# Altium PCB 2LayerPCBTemplateWWU.PcbDoc
Units mm, origin at the board's own origin, x right, y up, seen from the top; angles counter-clockwise.
Board outline 88.65 x 48.26 mm, 2 copper layers (Top Layer, Bottom Layer); 71 components, 68 nets, 259 pads, 33 vias.
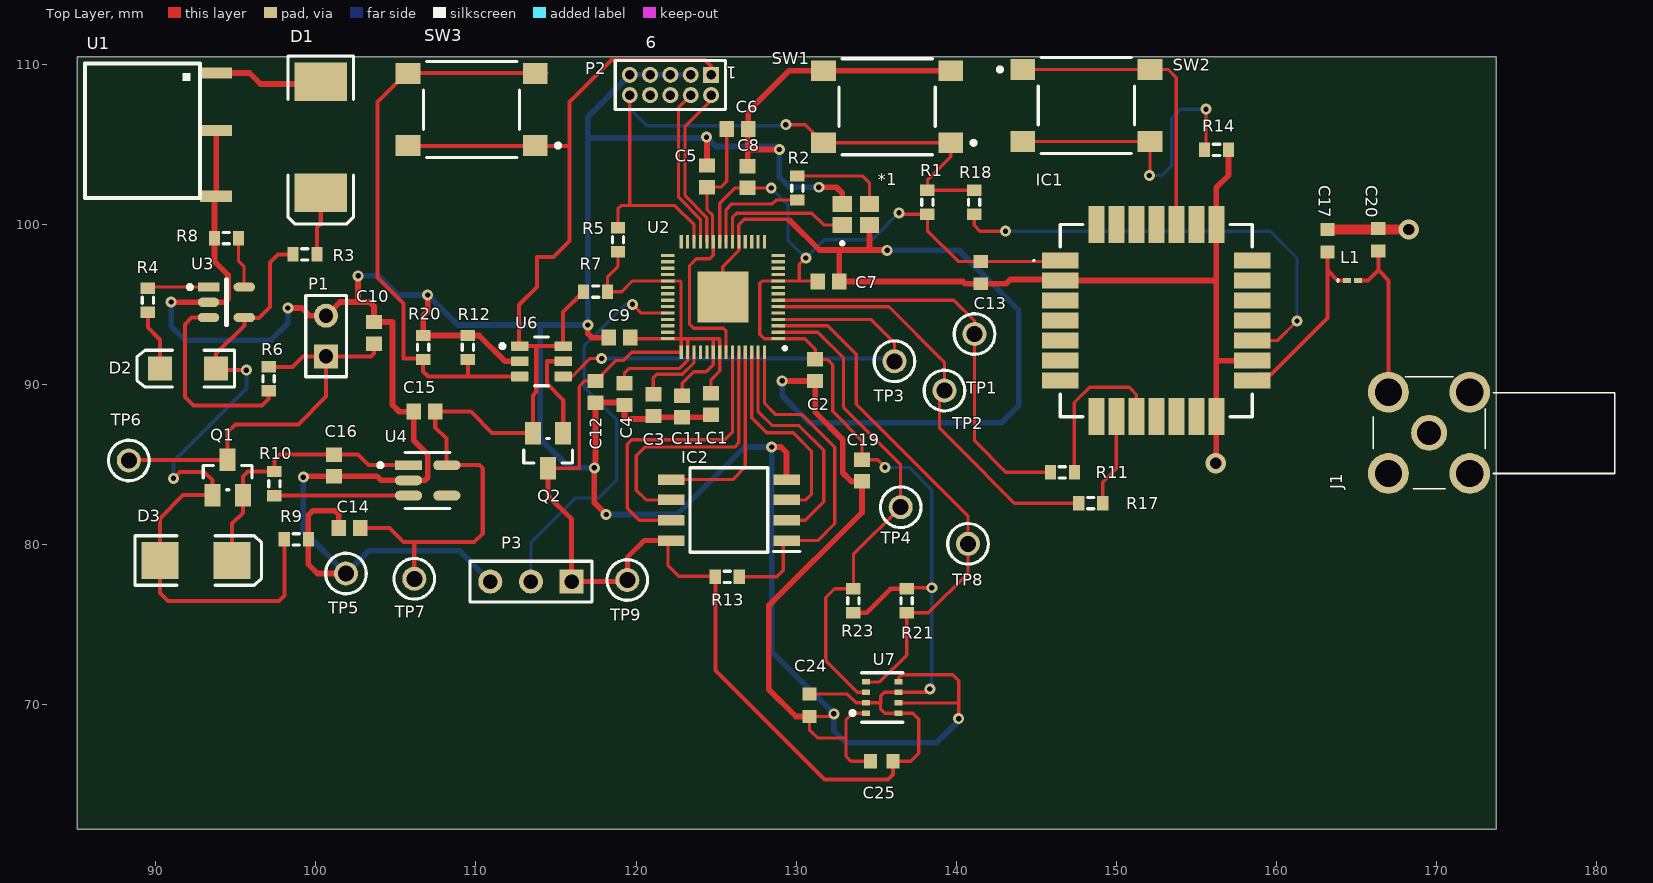
[diagram p0: Top Layer view]
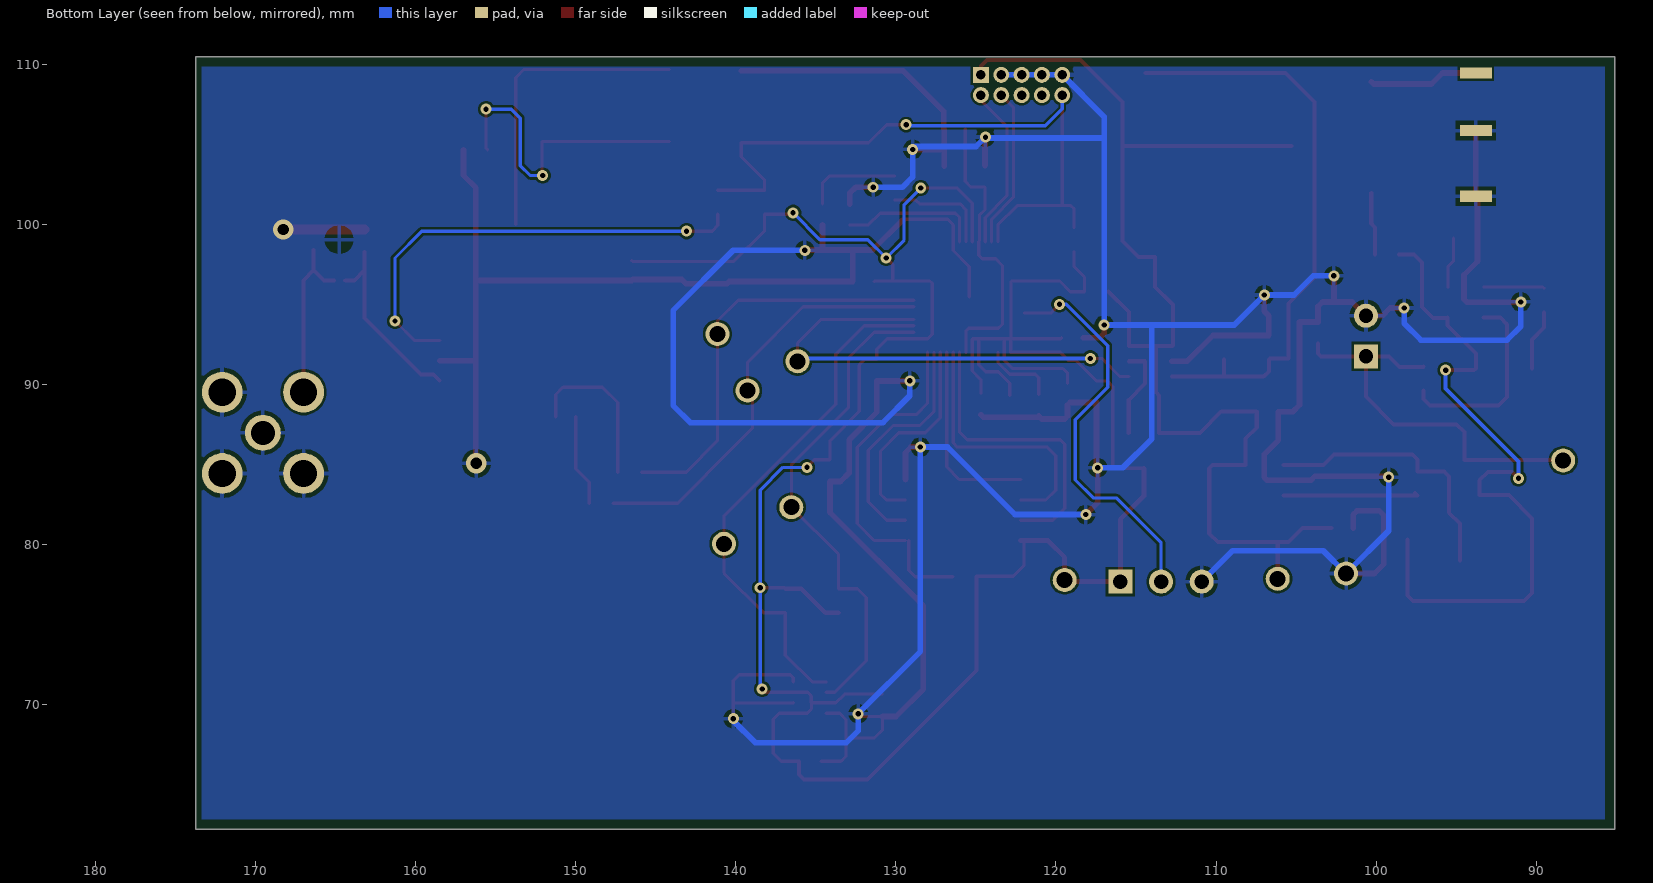
[diagram p1: Bottom Layer view, seen from below]

## Layer stack, top to bottom
Top Solder: solder mask 0.0102, Solder Resist, Dk 3.5
Top Layer: signal copper 0.0356
Dielectric 1: dielectric 0.32, FR-4, Dk 4.8
Bottom Layer: signal copper 0.0356
Bottom Solder: solder mask 0.0102, Solder Resist, Dk 3.5

## Board outline
85.09,62.23 173.736,62.23 173.736,110.49 85.09,110.49

## Design rules (kind name [scope] priority, off if disabled: settings)
Clearance [All] p1: gap=0.152 ignorepadtopadclearanceinfootprint=FALSE except(0: Arc-Hole Track-Hole SMDPad-Hole THPad-Hole Via-Hole Fill-Hole Poly-Hole Region-Hole Text-Hole)
HoleSize [All] p1: absolutevalues=TRUE maxlimit=3.175 minlimit=0.33 maxpercent=80.000 minpercent=20.000
MinimumSolderMaskSliver [All] p1: minsoldermaskwidth=0.025
PolygonConnect [All] p1: connectstyle=Relief reliefconductorwidth=0.254 reliefentries=4 polygonreliefangle="90 Angle" airgapwidth=0.254
RoutingVias [All] p1: holewidth=0.33 width=0.508 viastyle="Through Hole" minholewidth=0.33 minwidth=0.508 maxholewidth=3.175 maxwidth=6.35
SilkToSilkClearance [All] p1: silktosilkclearance=0.102
SilkToSolderMaskClearance [IsPad] p1: minsilkscreentomaskgap=0.152 clearancetoexposedcopper=TRUE
SolderMaskExpansion [All] p1: expansion=0.102 istentingtop=FALSE
Width [All] p1: maxlimit=12.7 minlimit=0.152 preferedwidth=0.635
26 further rules are at their usual default settings.

## Components (designator, comment, footprint, x,y, rotation, side; value= is the part's Value field where it differs from the comment)
*1 "ISM95-3251AH-12.000MHZ-Symbol-1" OSC_ISM951251AH32000MHZ 133.731,100.635 r90 top
C1 "Capacitor 10 pF +/- 0.25 pF 50 V 0603" CAPC1608X87X35NL15T15 124.689,88.798 r270 top value=1uF
C2 "Capacitor 10 pF +/- 0.25 pF 50 V 0603" CAPC1608X87X35NL15T15 131.191,90.907 r270 top value=100nF
C3 "Capacitor 10 pF +/- 0.25 pF 50 V 0603" CAPC1608X87X35NL15T15 121.08,88.722 r270 top value=1uF
C4 "Capacitor 10 pF +/- 0.25 pF 50 V 0603" CAPC1608X87X35NL15T15 119.276,89.408 r270 top value=100nF
C5 "Capacitor 10 pF +/- 0.25 pF 50 V 0603" CAPC1608X87X35NL15T15 124.435,103.022 r90 top value=100nF
C6 "Capacitor 10 pF +/- 0.25 pF 50 V 0603" CAPC1608X87X35NL15T15 126.34,105.969 r0 top value=100nF
C7 "Capacitor 10 pF +/- 0.25 pF 50 V 0603" CAPC1608X87X35NL15T15 132.029,96.444 r0 top value=100nF
C8 "Capacitor 10 pF +/- 0.25 pF 50 V 0603" CAPC1608X87X35NL15T15 126.975,102.972 r90 top value=100nF
C9 "Capacitor 10 pF +/- 0.25 pF 50 V 0603" CAPC1608X87X35NL15T15 118.974,92.939 r180 top value=100nF
C10 "Capacitor 10 pF +/- 0.25 pF 50 V 0603" CAPC1608X87X35NL15T15 103.632,93.243 r90 top value=10pF
C11 "Capacitor 10 pF +/- 0.25 pF 50 V 0603" CAPC1608X87X35NL15T15 122.884,88.646 r270 top value=100nF
C12 "Capacitor 10 pF +/- 0.25 pF 50 V 0603" CAPC1608X87X35NL15T15 117.472,89.56 r270 top value=100nF
C13 "Cap Semi" 1608[0603] 141.529,97.003 r90 top value=4.7uF
C14 "Capacitor 10 pF +/- 0.25 pF 50 V 0603" CAPC1608X87X35NL15T15 102.108,81.051 r180 top value=10uF
C15 "Capacitor 10 pF +/- 0.25 pF 50 V 0603" CAPC1608X87X35NL15T15 106.782,88.316 r180 top value=10uF
C16 "Capacitor 10 pF +/- 0.25 pF 50 V 0603" CAPC1608X87X35NL15T15 101.117,84.963 r270 top value=10uF
C17 "Cap Semi" 1608[0603] 163.195,98.995 r270 top value=DNP
C19 "Capacitor 10 pF +/- 0.25 pF 50 V 0603" CAPC1608X87X35NL15T15 134.112,84.633 r270 top value=1uF
C20 "Cap Semi" 1608[0603] 166.37,99.06 r270 top value=DNP
C24 "Cap Semi" 1608[0603] 130.835,69.977 r90 top value=100nF
C25 "Cap Semi" 1608[0603] 135.357,66.472 r0 top value=100nF
D1 "Diode" SMC 100.305,105.461 r270 top
D2 "LED2" 3.2X1.6X1.1 92.024,91.008 r180 top
D3 "D Schottky" SMB 92.507,79.019 r0 top
IC1 "LoRa-E5" LoRaE5 152.502,94.005 r0 top
IC2 "W25Q128JVSIM_TR" SOIC127P790X216-8N 125.805,82.169 r180 top
J1 "132136" 132136 167.005,89.535 r0 top
L1 "Inductor" 0603 164.75,96.52 r0 top value=0H
P1 "Header 2" HDR1X2 100.635,91.77 r90 top
P2 "MHDR2X5" MHDR2X5 124.689,109.36 r180 top
P3 "Header 3" HDR1X3 115.976,77.699 r180 top
Q1 "FDN340P" FP-527AG-MFG 94.488,84.201 r90 top
Q2 "FDN340P" FP-527AG-MFG 114.503,85.877 r270 top
R1 "Res3" J1-0603 138.201,101.397 r90 top value=10k
R2 "Res3" J1-0603 130.073,102.286 r90 top value=1K
R3 "Res3" J1-0603 99.314,98.146 r0 top value=1K
R4 "Res3" J1-0603 89.51,95.275 r90 top value=1K
R5 "Res3" J1-0603 118.872,99.06 r90 top value=10k
R6 "Res3" J1-0603 97.053,90.373 r90 top value=1K
R7 "Res3" J1-0603 117.475,95.809 r0 top value=0
R8 "Res3" J1-0603 94.412,99.162 r180 top value=1K
R9 "Res3" J1-0603 98.781,80.34 r0 top value=10k
R10 "Res3" J1-0603 97.409,83.82 r270 top value=10k
R11 "Res3" J1-0603 146.634,84.531 r180 top value=22
R12 "Res3" J1-0603 109.499,92.329 r90 top value=287k
R13 "Res3" J1-0603 125.705,78.003 r0 top value=10k
R14 "Res3" J1-0603 156.261,104.673 r180 top value=470
R17 "Res3" J1-0603 148.412,82.601 r180 top value=22
R18 "Res3" J1-0603 141.122,101.397 r270 top value=22
R20 "Res3" J1-0603 106.705,92.329 r90 top value=221k
R21 "Res3" J1-0603 136.906,76.505 r90 top value=4.7K
R23 "Res3" J1-0603 133.579,76.505 r270 top value=4.7K
SW1 "PTS645SM43SMTR92LFS" FP-PTS645SM43SMTR92LFS-MFG 135.687,107.366 r180 top
SW2 "PTS645SM43SMTR92LFS" FP-PTS645SM43SMTR92LFS-MFG 148.133,107.442 r0 top
SW3 "PTS645SM43SMTR92LFS" FP-PTS645SM43SMTR92LFS-MFG 109.728,107.188 r180 top
TP1 "5003" KSTN-5003 141.148,93.167 r0 top
TP2 "5003" KSTN-5003 139.268,89.637 r0 top
TP3 "5003" KSTN-5003 136.144,91.465 r0 top
TP4 "5003" KSTN-5003 136.536,82.347 r0 top
TP5 "5003" KSTN-5003 101.879,78.207 r0 top
TP6 "5003" KSTN-5003 88.316,85.268 r0 top
TP7 "5003" KSTN-5003 106.147,77.876 r0 top
TP8 "5003" KSTN-5003 140.741,80.061 r0 top
TP9 "5003" KSTN-5003 119.456,77.8 r0 top
U1 "54-00125" 54-00125 85.573,109.474 r0 top
U2 "RP2040" QFN40P700X700X90-57N-D 125.425,95.479 r180 top
U3 "MCP73831T-2ACI/OT" FP-C04-091-OT-IPC_B 94.412,95.148 r0 top
U4 "AP2112K-3.3TRG1" FP-SOT25-IPC_A 106.985,84.023 r0 top
U6 "TPL5110DDCT" FP-DDC0006A-MFG 114.097,91.465 r0 top
U7 "BME280" FP-BME280-MFG 135.382,70.46 r180 top

## Footprints (in the part's own frame and the unit in brackets; to place one, negate y for a bottom-side part, rotate by r counter-clockwise, add the part's x,y. Pads: shape width x height; smd on the part's side, far side on the other; paste and mask are expansions set on the pad)
3.2X1.6X1.1 [mm] "SMT LED; 2 Flat Leads"
  rect 1.5x1.5 smd: 1(-1.75,0) 2(1.75,0)
  silkscreen extent -2.9,-1.15 3.2,1.15
54-00125 [mm] "3.5x1.1mm Barrel Jack Connector"
  rect 2x0.7 all layers, no hole: 1(8.2,0) 2(8.2,-3.6) 3(8.2,-7.7)
  silkscreen extent 0,-7.8 7.2,0.6
0603 [mm] "Chip Inductor, Body 0.6x0.3mm, IPC High Density"
  rect 0.5x0.3 smd: 1(-0.35,0) 2(0.35,0)
  silkscreen extent -0.9,-0.05 -0.9,0.05, body extent -0.33,-0.18 0.33,0.18, height 0.55
1608[0603] [mm] "Chip Capacitor, Body 1.6x0.8mm, IPC High Density"
  rect 0.8x0.9 smd: 1(-0.7,0) 2(0.7,0)
  body extent -0.87,-0.48 0.87,0.48, height 1.3
132136 [mm]
  round 2.55 hole 1.7: 1(0,0) 2(0,-5.08) 3(5.08,-5.08) 4(5.08,0)
  round 2.25 hole 1.5: 5(2.54,-2.54)
  silkscreen extent -0.96,-6.04 14.14,0.96
CAPC1608X87X35NL15T15 [mm] "Chip Capacitor, 2-Leads, Body 1.75x0.95mm, IPC Medium Density"
  rect 0.9x1 smd: 1(-0.675,0) 2(0.675,0)
  body extent -0.87,-0.48 0.87,0.48, height 0.87
FP-527AG-MFG [mm]
  rect 1.4x1 smd paste+0 mask+0: 1(-1.1,0.95) 2(-1.1,-0.95) 3(1.1,0)
  silkscreen extent -0.76,-1.52 0.76,1.52, body extent -1.9,-1.62 1.9,1.62, height 0.25
FP-BME280-MFG [mm]
  rect 0.5x0.35 smd paste+0 mask+0: 1(1.025,0.975) 2(1.025,0.325) 3(1.025,-0.325) 4(1.025,-0.975) 5(-1.025,-0.975) 6(-1.025,-0.325) 7(-1.025,0.325) 8(-1.025,0.975)
  silkscreen extent -1.3,-1.55 1.97,1.55
FP-C04-091-OT-IPC_B [mm]
  rect 1.338x0.578 smd paste+0 mask+0: 1(-1.116,0.95)
  rrect100% 1.338x0.578 smd paste+0 mask+0: 2(-1.116,0) 3(-1.116,-0.95) 4(1.116,-0.95) 5(1.116,0.95)
  silkscreen extent -2.41,-1.45 0.05,1.45
FP-DDC0006A-MFG [mm]
  rrect17% 1.1x0.6 smd paste+0 mask+0: 1(-1.35,0.95) 2(-1.35,0) 3(-1.35,-0.95) 4(1.35,-0.95) 5(1.35,0) 6(1.35,0.95)
  silkscreen extent -2.57,-1.53 0.42,1.53, body extent -2,-1.63 2,1.63, height 0.25
FP-PTS645SM43SMTR92LFS-MFG [mm]
  rect 1.55x1.3 smd paste+0 mask+0: 1(-3.975,2.25) 2(3.975,2.25) 3(-3.975,-2.25) 4(3.975,-2.25)
  silkscreen extent -5.53,-3 3,3, body extent -4.85,-3.1 4.85,3.1, height 0.25
FP-SOT25-IPC_A [mm]
  rect 1.707x0.616 smd paste+0 mask+0: 1(-1.201,0.95)
  rrect100% 1.707x0.616 smd paste+0 mask+0: 2(-1.201,0) 3(-1.201,-0.95) 4(1.201,-0.95) 5(1.201,0.95)
  silkscreen extent -3.08,-1.75 1.4,1.75, body extent -2.55,-2 2.55,2, height 0.25
HDR1X2 [mm] "Connector; Header; 2 Position"
  rect 1.5x1.5 hole 0.9: 1(0,0)
  round 1.5 hole 0.9: 2(2.54,0)
  silkscreen extent -1.27,-1.27 3.81,1.27
HDR1X3 [mm] "Connector; Header; 3 Position"
  rect 1.5x1.5 hole 0.9: 1(0,0)
  round 1.5 hole 0.9: 2(2.54,0) 3(5.08,0)
  silkscreen extent -1.27,-1.27 6.35,1.27
J1-0603 [mm] "Chip Resistor, Body 1.6x0.8mm, IPC High Density"
  rect 0.7x0.9 smd: 1(-0.75,0) 2(0.75,0)
  silkscreen extent -0.2,-0.35 0.2,0.35, body extent -0.85,-0.48 0.85,0.48, height 0.9
KSTN-5003 [mm] "Test Point, Through Hole, Dia 2.54mm"
  round 1.5 hole 1: 1(0,0)
  silkscreen extent -1.27,-1.27 1.27,1.27, body extent -1.27,-1.27 1.27,1.27, height 4.57
LoRaE5 [mm]
  rect 2.3x1 smd: 1(-6,3.75) 2(-6,2.5) 3(-6,1.25) 4(-6,0) 5(-6,-1.25) 6(-6,-2.5) 7(-6,-3.75) 15(6,-3.75) 16(6,-2.5) 17(6,-1.25) 18(6,0) 19(6,1.25) 20(6,2.5) 21(6,3.75)
  rect 1x2.3 smd: 8(-3.75,-6) 9(-2.5,-6) 10(-1.25,-6) 11(0,-6) 12(1.25,-6) 13(2.5,-6) 14(3.75,-6) 22(3.75,6) 23(2.5,6) 24(1.25,6) 25(0,6) 26(-1.25,6) 27(-2.5,6) 28(-3.75,6)
  silkscreen extent -7.7,-6 6,6, body extent -6,-6 6,6, height 2.6
MHDR2X5 [mm] "Connector; Header; 5x2 Position"
  rect 1x1 hole 0.6: 1(0,0)
  round 1 hole 0.6: 2(0,1.27) 3(1.27,0) 4(1.27,1.27) 5(2.54,0) 6(2.54,1.27) 7(3.81,0) 8(3.81,1.27) 9(5.08,0) 10(5.08,1.27)
  silkscreen extent -0.9,-0.9 5.98,2.17
OSC_ISM951251AH32000MHZ [mm]
  rect 1x1.2 smd: 1(-0.65,0.85) 2(-0.65,-0.85) 3(0.65,-0.85) 4(0.65,0.85)
  silkscreen extent -1.9,0.75 -1.7,0.95, body extent -1,-1.25 1,1.25, height 1
QFN40P700X700X90-57N-D [mm]
  rect 0.85x0.2 smd: 1(-3.45,2.6) 2(-3.45,2.2) 3(-3.45,1.8) 4(-3.45,1.4) 5(-3.45,1) 6(-3.45,0.6) 7(-3.45,0.2) 8(-3.45,-0.2) 9(-3.45,-0.6) 10(-3.45,-1) 11(-3.45,-1.4) 12(-3.45,-1.8) 13(-3.45,-2.2) 14(-3.45,-2.6) 29(3.45,-2.6) 30(3.45,-2.2) 31(3.45,-1.8) 32(3.45,-1.4) 33(3.45,-1) 34(3.45,-0.6) 35(3.45,-0.2) 36(3.45,0.2) 37(3.45,0.6) 38(3.45,1) 39(3.45,1.4) 40(3.45,1.8) 41(3.45,2.2) 42(3.45,2.6)
  rect 0.2x0.85 smd: 15(-2.6,-3.45) 16(-2.2,-3.45) 17(-1.8,-3.45) 18(-1.4,-3.45) 19(-1,-3.45) 20(-0.6,-3.45) 21(-0.2,-3.45) 22(0.2,-3.45) 23(0.6,-3.45) 24(1,-3.45) 25(1.4,-3.45) 26(1.8,-3.45) 27(2.2,-3.45) 28(2.6,-3.45) 43(2.6,3.45) 44(2.2,3.45) 45(1.8,3.45) 46(1.4,3.45) 47(1,3.45) 48(0.6,3.45) 49(0.2,3.45) 50(-0.2,3.45) 51(-0.6,3.45) 52(-1,3.45) 53(-1.4,3.45) 54(-1.8,3.45) 55(-2.2,3.45) 56(-2.6,3.45)
  rect 3.2x3.2 smd: 57(0,0)
  silkscreen extent -3.98,3.1 -3.78,3.3, body extent -3.55,-3.55 3.55,3.55, height 0.9
SMB [mm] "DO-214-AA/SMB; 2 C-Bend Leads; Body 5.3 x 3.6 mm, inc. leads (LxW)"
  rect 2.3x2.3 smd: 1(-2.25,0) 2(2.25,0)
  silkscreen extent -3.8,-1.55 4.1,1.55
SMC [mm] "DO-214-AB/SMC; 2 C-Bend Leads; Body 7.9 x 5.9 mm, inc. leads (LxW)"
  rect 2.4x3.3 smd: 1(-3.475,0) 2(3.475,0)
  silkscreen extent -5.07,-2.05 5.43,2.05
SOIC127P790X216-8N [mm]
  rect 1.65x0.65 smd: 1(-3.6,1.905) 2(-3.6,0.635) 3(-3.6,-0.635) 4(-3.6,-1.905) 5(3.6,-1.905) 6(3.6,-0.635) 7(3.6,0.635) 8(3.6,1.905)
  silkscreen extent -4.43,-2.64 2.42,2.64, body extent -3.95,-2.64 3.95,2.64, height 2.16

## Part data
C1 C2 C3 C4 C5 C6 C7 C8 C9 C10 C11 C12 C14 C15 C16 C19: library part CMP-001-00012-5, "Chip Capacitor, 10 pF, +/- 0.25 pF, 50 V, 0603 (1608 Metric)", Capacitor Type=Ceramic, Case/Package=0603, Max Operating Temperature=125°C, Min Operating Temperature=-55°C, Tolerance=0.25%, Voltage Rating=50V, Mounting Technology=SM, Pins=2, RoHS Compliant=True
C13 C17 C20 C24 C25: "Capacitor (Semiconductor SIM Model)", LatestRevisionDate=29-May-2009, LatestRevisionNote="IPC-7351 Footprint Added.", PackageDescription="Chip Capacitor", PackageReference=C1206, Published=8-Jun-2000, Publisher="Altium Limited"
D1: "Default Diode", Code_JEDEC=DO-214-AB, LatestRevisionDate=17-Jul-2002, LatestRevisionNote="Re-released for DXP Platform.", PackageDescription="DO-214-AB/SMC; 2 C-Bend Leads; Body 7.9 x 5.9 mm, inc. leads (LxW)", PackageReference=SMC, PackageVersion=Sep-1996, Published=8-Jun-2000, Publisher="Altium Limited"
D2: "Typical RED, GREEN, YELLOW, AMBER GaAs LED", LatestRevisionDate=17-Jul-2002, LatestRevisionNote="Re-released for DXP Platform.", PackageDescription="SM LED; 2 Flat Leads", PackageReference=3.2X1.6X1.1, PackageVersion=Feb-2002, Published=8-Jun-2000, Publisher="Altium Limited"
D3: "Schottky Diode", Code_JEDEC=DO-214-AA, LatestRevisionDate=17-Jul-2002, LatestRevisionNote="Re-released for DXP Platform.", PackageDescription="DO-214-AA/SMB; 2 C-Bend Leads; Body 5.3 x 3.6 mm, inc. leads (LxW)", PackageReference=SMB, Published=8-Jun-2000, Publisher="Altium Limited"
IC1: "Integrated Circuit", Manufacturer_Name="Seeed Studio", Datasheet Link=https://no.mouser.com/datasheet/2/744/LoRa_E5_module_datasheet_V1_0-2488126.pdf, Height=2.5mm, Manufacturer_Part_Number=LoRa-E5
IC2: "Integrated Circuit", Arrow Part Number="W25Q128JVSIM TR", Manufacturer_Name=Winbond, Mouser Part Number=454-W25Q128JVSIMTR, Arrow Price/Stock=https://www.arrow.com/en/products/w25q128jvsimtr/winbond-electronics?region=nac, Datasheet Link=http://www.winbond.com/resource-files/w25q128jv%20dtr%20revb%2011042016.pdf, Height=2.16mm, Manufacturer_Part_Number="W25Q128JVSIM TR", Mouser Price/Stock=https://www.mouser.co.uk/ProductDetail/Winbond/W25Q128JVSIM-TR?qs=qSfuJ%252Bfl%2Fd6ji9IuruL6Zg%3D%3D
J1: "Connector", Manufacturer_Name=Amphenol, Mouser Part Number=523-132136, Arrow Part Number=132136, Arrow Price/Stock=https://www.arrow.com/en/products/132136/amphenol-rf, Datasheet Link=https://componentsearchengine.com/Datasheets/5/132136.pdf, Height=10.26mm, Manufacturer_Part_Number=132136, Mouser Price/Stock=https://www.mouser.co.uk/ProductDetail/Amphenol-RF/132136?qs=Ld4zsxSTIA6C8fkM7Uvm2Q%3D%3D
P1: "Header, 2-Pin", LatestRevisionDate=17-Jul-2002, LatestRevisionNote="Re-released for DXP Platform.", Publisher="Altium Limited"
P2: "Header, 5-Pin, Dual row", LatestRevisionDate=17-Jul-2002, LatestRevisionNote="Re-released for DXP Platform.", Publisher="Altium Limited"
P3: "Header, 3-Pin", LatestRevisionDate=17-Jul-2002, LatestRevisionNote="Re-released for DXP Platform.", Publisher="Altium Limited"
Q1 Q2: library part CMP-2100-03638-2, "MOSFET P-CH 20V 2A SSOT3", Case/Package=SOT-23, Continuous Drain Current (ID)=2A, Current Rating=-2A, Drain to Source Breakdown Voltage=-20V, Drain to Source Resistance=60mR, Drain to Source Voltage (Vdss)=20V, Gate to Source Voltage (Vgs)=8V, Input Capacitance=779pF, Max Operating Temperature=150°C, Max Power Dissipation=500mW, Min Operating Temperature=-55°C, On-State Resistance=70MR, Package Quantity=1, Threshold Voltage=-800mV, Contact Plating=Tin, Dual Supply Voltage=-20V, Element Configuration=Single, Fall Time=11ns, Height=0.94mm, Lead Free="Lead Free", Length=2.92mm, Mount="Surface Mount", Nominal Vgs=-800mV, Number of Elements=1, Number of Pins=3, Packaging="Tape and Reel", Power Dissipation=500mW, Radiation Hardening=No, Rds On Max=70mR, REACH SVHC="No SVHC", Rise Time=9ns, Termination=SMD/SMT, Turn-Off Delay Time=27ns, Turn-On Delay Time=10ns, Voltage Rating (DC)=-20V, Weight=0.03g, Width=3.05mm
R1 R2 R3 R4 R5 R6 R7 R8 R9 R10 R11 R12 R13 R14 R17 R18 R20 R21 R23: "Resistor", LatestRevisionDate=29-May-2009, LatestRevisionNote="IPC-7351 Footprint Added.", PackageDescription="Chip Resistor", PackageReference=J1-0603, Published=8-Jun-2000, Publisher="Altium Limited"
SW1 SW2 SW3: library part CMP-2000-05160-2, "SWITCH TACTILE SPST-NO 0.05A 12V", Case/Package=SMD/SMT, Color=Black, Contact Resistance=100mR, Current Rating=50mA, Max Operating Temperature=60°C, Max Voltage Rating (DC)=12V, Min Operating Temperature=-20°C, Operating Force=160gf, Package Quantity=1, Actuator Length=0.85mm, Actuator Material=Nylon, Actuator Type=Standard, Contact Material=Silver, Contact Plating=Silver, Depth=9mm, Illumination Type=Non-Illuminated, Lead Free="Lead Free", Length=6mm, Max Current Rating=50mA, Mechanical Life=100000Cycles, Mount="Surface Mount", Orientation=Straight, Packaging="Tape and Reel", REACH SVHC="No SVHC", Switch Function=Off-Mom, Termination="Gull Wing", Throw Configuration=SPST, Voltage Rating (DC)=12V
TP1 TP2 TP3 TP4 TP5 TP6 TP7 TP8 TP9: library part CMP-002-00037-1, "Test Point, Orange, Height 4.6 mm, Tail Length 3 mm, 1-Pin THD, RoHS", Colour=Orange, Manufacturer=Keystone, Package Description="1-Pin Through Hole Device, Dia 2.54 mm", Package Quantity=10, Case/Package=5003, Connector Type=TestPoint, Contact Material=Bronze, Contact Plating=Tin, Datasheet URL=http://keyelco.com/userAssets/file/M65p56.pdf, Datasheet Version=Jun-15, Diameter=2.54mm, Manufacturer URL=http://www.keyelco.com/, Mounting Technology=TH, Package Reference=5003, Packaging=Bulk, Pins=1, RoHS Compliant=True
U1: "3.5x1.1mm Barrel Jack Connector"
U2: "RP2040 Raspberry Pi Pico - ARMÂ® CortexÂ®-M0+ MCU 32-Bit Embedded Evaluation Board", Package=Package, Availability="In Stock", Check_prices=https://www.snapeda.com/parts/RP2040/Raspberry%20Pi/view-part/5800506/?ref=eda, MF="Raspberry Pi", MP=RP2040, Price=None, Purchase-URL=https://pricing.snapeda.com/search/part/RP2040/?ref=eda, SnapEDA_Link=https://www.snapeda.com/parts/RP2040/Raspberry%20Pi/view-part/5800506/?ref=snap
U3: library part CMP-0133-00143-2, "IC CONTROLLR LI-ION 4.2V SOT23-5", Case/Package=SOT-23, Drain to Source Resistance=350mR, Max Charge Current=500mA, Max Input Voltage=6V, Max Operating Temperature=85°C, Max Output Voltage=4.5V, Max Power Dissipation=1.54W, Min Operating Temperature=-40°C, Min Output Voltage=4.168V, Min Supply Voltage=3.75V, Output Voltage=4.2V, Voltage Rating=4.534V, Contact Plating=Tin, Height=0.051inch, Lead Free="Lead Free", Length=0.122inch, Max Supply Voltage=6V, Mount="Surface Mount", Number of Cells=1, Number of Channels=1, Number of Outputs=1, Number of Pins=5, Output Current=500mA, Packaging="Tape and Reel", Radiation Hardening=No, REACH SVHC="No SVHC", Termination=SMD/SMT, Weight=0.00709oz, Width=0.071inch
U4: library part CMP-12756-000035-1, "IC REG LINEAR 3.3V 600MA SOT25", Case/Package=SOT-23-5, Dropout Voltage=250mV, Max Input Voltage=6V, Max Operating Temperature=85°C, Max Output Current=600mA, Min Input Voltage=2.5V, Min Operating Temperature=-40°C, Output Voltage=3.3V, Package Quantity=1, Quiescent Current=55uA, Accuracy=1.5%, Height=1.3mm, Lead Free="Lead Free", Length=3.1mm, Mount="Surface Mount", Number of Outputs=1, Number of Pins=5, Number of Regulators=1, Output Current=600mA, Output Type=Fixed, Packaging="Tape and Reel", Polarity=Positive, Width=1.7mm
U6: library part CMP-04858-000011-1, "IC OSC PROG TIMER TSOT23-6", Manufacturer="Texas Instruments", Max Junction Temp=+150°C, Max Supply Voltage=5.5V, Min Supply Voltage=1.8V, Nominal Supply Current=0.035uA, Package=DDC0006A, Temperature="-40°C to +105°C", Temperature Range High=+105°C, Temperature Range Low=-40°C, Automotive=No, Category=IC, ComponentLink2Description=Datasheet, ComponentLink2URL=http://www.ti.com/lit/ds/symlink/tpl5110.pdf, Device Class L1="Integrated Circuits (ICs)", Device Class L2="Clock and Timing", Device Class L3="Timers and Oscillators", Digikey Description="IC OSC PROG TIMER TSOT23-6", Height=1.1mm, Lead Free=Yes, Manufacturer Part Number=TPL5110DDCT, Mouser Description="Timers & Support Products Ultra Lw Pwr Timer", Number Of Timers/Counters=1, Octopart=https://octopart.com/tpl5110ddct-texas+instruments-52670271, RoHS=TRUE, Standoff Height=0mm
U7: library part CMP-2000-05073-3, "SENSOR PRESSURE HUMIDITY TEMP", Case/Package=LGA, Max Operating Temperature=85°C, Min Operating Temperature=-40°C, Accuracy=3%, Lead Free="Lead Free", Mount="Surface Mount", Number of Pins=8, Output Type=SPI, Packaging="Cut Tape", Response Time=1s, Sensor Type=Temperature
L1: Code_IEC=1005, Code_JEITA=0402, LatestRevisionDate=29-May-2009, LatestRevisionNote="IPC-7351 Footprint Added.", PackageDescription="Chip Inductor", PackageReference=0402-A, Published=8-Jun-2000, Publisher="Altium Limited"

## Via types
v1: diameter 0.686, hole 0.33, Top Layer to Bottom Layer, 31 vias
v2: diameter 1.27, hole 0.711, Top Layer to Bottom Layer, 2 vias

## Nets (pads, with @x,y where several pads share a name; then routed paths per layer and width w, separated by ;. In a path a pad name is that pad's centre, name@x,y a point inside that pad or via, vN(x,y) a via of type N, cw(c..) or ccw(c..) an arc to the next point about the centre after c; other vN are vias at no path point)
3V3: C14.1 C15.1 P2.1 Q2.2 R7.1 SW3.1 SW3.2 TP7.1 U4.5 U6.1 U6.6 | length 77.7
  Top Layer w0.254: C14.1 104.597,81.051 105.486,80.162 106.147,80.162 ; SW3.2@105.275,104.902 115.849,104.902 ; TP7.1 106.147,80.162 ; R7.1 115.447,94.531 U6.6 113.767,92.415 ; P2.1 124.689,109.906 124.308,110.287 118.466,110.287 115.849,107.671 115.849,104.902 ; 106.147,80.162 109.88,80.162 110.426,80.709 110.426,84.772 110.211,84.988 108.17,84.988 108.153,85.005 108.153,86.639 107.457,87.336 C15.1 109.677,88.316 111.016,86.977 Q2.2 113.553,89.322 113.767,89.535 113.767,92.415 ; 113.767,92.415 U6.1 112.7,92.462 112.7,94.996 113.805,96.101 113.805,97.978 114.844,97.978 115.849,98.984 115.849,104.902
DONE: TP3.1 U2.4 U6.4 | length 30.3
  Top Layer w0.203: U6.4 116.017,90.515 117.145,91.643 v1(117.856,91.643) ; U2.4 132.693,94.079 134.674,94.079 136.144,92.608 TP3.1
  Bottom Layer w0.254: v1(117.856,91.643) 135.966,91.643 TP3.1
GND: *1.2 *1.4 C1.2 C2.2 C3.2 C4.2 C5.2 C6.2 C7.2 C8.2 C9.2 C10.2 C11.2 C12.2 C13.1 C14.2 C15.2 C16.2 C17.1 C19.2 C20.1 C24.1 C25.1 IC1.2 IC1.14 IC1.16 IC1.22 IC2.4 J1.2 J1.3 J1.4 J1.5 P1.2 P2.3 P2.5 P2.7 P2.9 P3.3 R8.2 R9.2 R12.2 R14.1 R20.2 SW1.3 SW1.4 TP5.1 U1.2 U1.3 U2.19 U2.57 U3.2 U4.2 U6.2 U7.1 U7.5 U7.7 | length 388.8
  Top Layer w0.203: U2.57 125.425,97.384 126.425,98.384 U2.19 126.425,99.984 126.771,100.33 129.54,100.33 129.54,100.279 ; v1(132.359,69.444) 132.193,69.277 C24.1 130.835,68.453 131.356,67.932 133.121,67.932 ; U7.1 133.518,69.485 133.121,69.088 133.121,67.932 ; C25.1 133.426,66.472 133.121,66.777 133.121,67.932 ; U7.7 136.426,70.116 140.12,70.116 140.157,70.079 ; U7.5 136.407,71.688 136.601,71.882 139.776,71.882 140.157,71.501 140.157,70.079 ; v1(140.157,69.139) 140.157,70.079
  Top Layer w0.356: v1(90.957,95.174) 90.983,95.148 U3.2 94.31,95.148 94.513,95.352 94.513,96.85 93.662,97.702 R8.2 93.662,101.663 U1.3 U1.2 ; v1(98.247,94.793) 99.125,94.793 99.607,94.31 P1.2 101.498,95.174 102.616,95.174 ; v1(99.212,84.226) 99.274,84.288 C16.2 103.824,84.288 104.089,84.023 U4.2 106.807,84.023 106.985,84.201 106.985,85.649 106.107,86.527 C15.2 105.207,88.316 104.79,88.733 104.79,93.918 C10.2 103.632,94.894 103.353,95.174 102.616,95.174 ; C14.2 101.433,81.89 101.204,82.118 99.797,82.118 99.531,81.852 R9.2 99.531,78.777 100.101,78.207 TP5.1 ; v1@102.636,96.794 102.636,95.194 102.616,95.174 ; v1(106.985,95.606) 106.985,94.59 106.705,94.31 R20.2 R12.2 110.197,93.079 111.811,91.465 U6.2 ; v1(116.992,93.726) 116.992,93.193 117.246,92.939 C9.2 ; v1(118.135,81.89) 117.399,82.626 v1(117.399,84.811) 117.472,84.883 C12.2 119.123,88.885 C4.2 119.276,88.039 119.456,87.859 120.891,87.859 C3.2 121.156,87.971 C11.2 124.536,87.971 C1.2 ; v1(124.409,105.461) 124.435,105.435 C5.2 ; C8.2 126.975,104.699 ; v1(128.473,86.106) 129.057,86.106 129.405,85.758 IC2.4 ; v1(128.956,104.699) 126.975,104.699 ; v1(129.134,90.246) 129.148,90.232 C2.2 131.191,88.29 132.918,86.563 132.918,84.506 133.466,83.958 C19.2 134.112,82.017 128.295,76.2 128.295,70.968 129.986,69.277 C24.1 ; 129.54,100.279 129.591,100.279 131.457,98.413 132.704,98.413 ; v1(131.42,102.337) 132.512,102.337 132.881,101.967 *1.4 ; 134.581,98.449 *1.2 ; v1@135.673,98.413 132.704,98.413 ; SW1.3 SW1.4 129.555,109.616 127.015,107.076 C6.2 126.975,105.929 126.975,104.699 ; v2@156.252,85.09 IC1.14 156.252,96.511 ; 156.337,91.505 IC1.16 ; R14.1 157.011,103.08 156.252,102.32 IC1.22 156.252,96.511 ; 132.704,98.413 C7.2 140.411,96.444 140.552,96.303 C13.1 143.115,96.303 143.383,96.571 146.436,96.571 IC1.2 156.246,96.505 156.252,96.511
  Top Layer w0.635: C17.1 165.735,99.695 v2(168.275,99.695)
  Bottom Layer w0.356: v1(90.957,95.174) 90.957,93.65 91.821,92.786 97.206,92.786 98.247,93.828 v1(98.247,94.793) ; v1(99.212,84.226) 99.212,80.874 TP5.1 103.302,79.629 108.966,79.629 P3.3 ; v1(102.641,96.799) 103.937,96.799 105.131,95.606 v1(106.985,95.606) 108.864,93.726 114.021,93.726 ; v1(117.399,84.811) 115.824,84.811 114.021,86.614 114.021,93.726 ; v1(118.135,81.89) 122.555,81.89 126.771,86.106 v1(128.473,86.106) 128.473,73.33 v1(132.359,69.444) 132.359,68.377 133.096,67.64 138.786,67.64 140.157,69.012 v1(140.157,69.139) ; P2.3 P2.5 P2.7 P2.9 116.992,106.744 116.992,105.41 ; v1(129.134,90.246) 129.134,89.306 130.81,87.63 142.85,87.63 143.916,88.697 143.916,94.64 140.157,98.4 v1(135.687,98.4) ; v1(131.42,102.337) 129.591,102.337 128.956,102.972 v1(128.956,104.699) 128.778,104.877 124.993,104.877 v1(124.409,105.461) 124.358,105.41 116.992,105.41 ; 114.021,93.726 v1(116.992,93.726) 116.992,105.41
  other v2: 156.21,85.09
GPIO3: U2.5
GPIO6: U2.8
GPIO7: U2.9
GPIO8: U2.11
GPIO9: U2.12
GPIO10: U2.13
GPIO11: U2.14
GPIO12: U2.15
GPIO13: U2.16
GPIO14: U2.17
GPIO15: U2.18
GPIO16: U2.27
GPIO17: U2.28
GPIO18: U2.29
GPIO19: U2.30
GPIO20: U2.31
GPIO21: U2.32
GPIO22: U2.34
GPIO23: U2.35
GPIO24: U2.36
GPIO25: U2.37
GPIO26/ADC1: U2.39
GPIO26/ADC2: U2.40
GPIO26/ADC3: U2.41
Net*1_3: *1.3 R2.2 | length 6
  Top Layer w0.203: R2.2 134.175,103.036 134.581,102.63 *1.3
NetC3_1: C3.1 U2.45 | length 4.6
  Top Layer w0.203: C3.1 121.08,90.448 121.285,90.653 122.889,90.653 123.625,91.389 U2.45
NetC5_1: C5.1 C6.1 U2.23 U2.50 | length 18.3
  Top Layer w0.203: U2.50 125.625,93.348 125.451,93.523 123.596,93.523 123.342,93.777 123.342,97.434 123.774,97.866 124.612,97.866 124.825,98.079 U2.23 124.781,98.973 124.781,100.588 124.435,100.934 C5.1 125.309,102.347 125.665,102.703 C6.1
NetC16_1: C16.1 D3.2 Q1.2 R10.1 U4.1 | length 17.2
  Top Layer w0.254: D3.2 94.757,81.32 95.438,82.001 Q1.2 95.438,84.262 95.746,84.57 R10.1 97.409,85.319 97.728,85.638 C16.1 102.622,85.638 103.287,84.973 U4.1
NetC17_2: C17.2 IC1.15 L1.1 | length 11.9
  Top Layer w0.252: IC1.15 158.876,90.629 159.669,90.629 163.195,94.155 163.195,97.155 ; C17.2 163.195,97.155 ; L1.1 163.83,96.52 163.195,97.155
NetC20_2: C20.2 J1.1 L1.2 | length 10.7
  Top Layer w0.254: L1.2 165.735,96.52 166.37,97.155 ; C20.2@166.37,98.413 166.37,97.155 ; J1.1 167.005,96.52 166.37,97.155
NetD1_2: D1.2 R3.2 | length 3.9
  Top Layer w0.254: R3.2 100.064,99.835 100.305,100.076 D1.2
NetD2_2: D2.2 R4.1 | length 3.8
  Top Layer w0.254: R4.1 89.51,93.574 90.274,92.809 D2.2
NetIC1_9: IC1.9 R17.1 | length 5.8
  Top Layer w0.203: R17.1 149.162,83.91 150.002,84.749 IC1.9
NetIC1_10: IC1.10 R11.1 | length 10.2
  Top Layer w0.203: R11.1 147.384,88.888 148.336,89.84 150.8,89.84 151.252,89.388 IC1.10
NetIC1_17: IC1.17 R18.2 | length 28.9
  Top Layer w0.203: R18.2 141.122,99.949 141.478,99.593 v1(143.078,99.593) ; IC1.17 160.065,92.755 v1(161.29,93.98)
  Bottom Layer w0.203: v1(143.078,99.593) 159.614,99.593 161.29,97.917 v1(161.29,93.98)
NetIC1_24: IC1.24 SW2.1 SW2.2 | length 19
  Top Layer w0.203: SW2.1 SW2.2 153.249,109.692 153.752,109.189 IC1.24
NetQ2_1: Q2.1 U6.5 | length 5.9
  Top Layer w0.254: U6.5 114.427,91.465 114.427,90.068 115.453,89.042 Q2.1
NetR4_2: R4.2 U3.1 | length 3.8
  Top Layer w0.203: R4.2 89.583,96.098 U3.1
NetR6_1: R6.1 U3.3 | length 12.3
  Top Layer w0.254: U3.3 92.243,94.198 91.821,93.777 91.821,89.23 92.354,88.697 96.647,88.697 97.053,89.103 R6.1
NetR8_1: R8.1 U3.5 | length 3.2
  Top Layer w0.203: R8.1 95.162,97.751 95.504,97.409 95.504,96.122 U3.5
NetR10_2: R10.2 U4.3 | length 8.6
  Top Layer w0.254: R10.2@97.565,83.226 R10.2 105.781,83.07 U4.3
NetR12_1: R12.1 R20.1 SW3.3 SW3.4 U6.3 | length 37.3
  Top Layer w0.254: R12.1 109.499,90.592 109.423,90.515 ; U6.3 109.423,90.515 ; SW3.3@114.416,109.474 113.703,109.474 105.664,109.474 105.105,108.915 105.105,108.903 103.861,107.658 103.861,96.698 105.486,95.072 105.486,91.643 106.641,91.643 R20.1 106.705,90.83 107.02,90.515 109.423,90.515
NetR14_2: R14.2 SW2.3 SW2.4 | length 19.6
  Top Layer w0.203: SW2.3 SW2.4 152.108,103.111 v1(152.07,103.073) ; R14.2 155.6,104.763 v1(155.6,107.213)
  Bottom Layer w0.203: v1(152.07,103.073) 152.857,103.073 153.467,103.683 153.467,106.655 154.026,107.213 v1(155.6,107.213)
QSPI_CSN: IC2.1 R13.2 U2.56 | length 21.7
  Top Layer w0.203: R13.2 128.803,78.003 129.203,78.403 IC2.1@129.203,80.264 ; U2.56 128.025,88.84 128.727,88.138 130.378,88.138 132.41,86.106 132.41,81.331 131.343,80.264 IC2.1
QSPI_SCLK: IC2.6 U2.52 | length 17
  Top Layer w0.203: IC2.6 120.625,82.804 120.015,83.414 120.015,85.573 120.548,86.106 126.162,86.106 126.425,86.369 126.425,90.992 U2.52
QSPI_SD0: IC2.5 U2.53 | length 12.1
  Top Layer w0.203: IC2.5 126.035,84.074 126.825,84.864 U2.53
QSPI_SD1: IC2.2 U2.55 | length 14.8
  Top Layer w0.203: U2.55 127.625,88.326 128.499,87.452 130.175,87.452 131.724,85.903 131.724,82.677 130.581,81.534 IC2.2
QSPI_SD2: IC2.3 U2.54 | length 13.1
  Top Layer w0.203: U2.54 127.225,87.938 128.168,86.995 129.819,86.995 130.962,85.852 130.962,83.16 130.607,82.804 IC2.3
QSPI_SD3: IC2.7 U2.51 | length 18.9
  Top Layer w0.203: IC2.7 120.193,81.534 119.456,82.271 119.456,86.284 119.736,86.563 125.552,86.563 126.025,87.036 U2.51
RESET: P2.10 R1.2 R5.2 R18.1 SW1.1 SW1.2 U2.26 | length 42.8
  Top Layer w0.203: R5.2 118.872,100.99 119.075,101.194 119.634,101.194 ; P2.10 119.609,101.219 119.634,101.194 ; U2.26 123.625,99.996 122.428,101.194 119.634,101.194 ; v1(129.362,106.248) 130.579,106.248 SW1.2 SW1.1 139.662,104.229 138.201,102.768 R1.2 R18.1
  Bottom Layer w0.203: P2.10 119.609,107.239 120.675,106.172 120.929,106.172 129.286,106.172 v1(129.362,106.248)
RXD: R11.2 TP1.1 U2.7 | length 25.9
  Top Layer w0.203: U2.7 139.849,95.279 141.148,93.98 TP1.1 141.148,86.487 143.104,84.531 R11.2
SCL: R21.1 TP8.1 U2.3 U7.4 | length 32.9
  Top Layer w0.203: U2.3 131.975,93.679 133.756,91.897 133.756,88.773 140.741,81.788 TP8.1 140.741,78.232 138.264,75.755 R21.1 136.906,73.101 135.239,71.435 U7.4
SDA: R23.1 TP4.1 U2.2 U7.3 | length 31.1
  Top Layer w0.203: U2.2 131.359,93.279 132.969,91.669 132.969,88.57 136.525,85.014 136.525,82.347 133.579,79.4 R23.1 132.398,77.255 131.851,76.708 131.851,75.209 131.851,72.746 133.812,70.785 U7.3
SOIL_SIG: P3.2 U2.38 | length 25.2
  Top Layer w0.203: v1(119.786,95.021) 120.329,94.479 U2.38
  Bottom Layer w0.203: P3.2 113.436,80.137 116.23,82.931 117.678,82.931 118.796,84.049 118.796,87.808 116.764,89.84 116.764,92.431 119.355,95.021 v1(119.786,95.021)
SWCLK: P2.2 U2.24 | length 10.1
  Top Layer w0.203: U2.24 124.425,100.441 123.063,101.803 123.063,106.147 P2.2@124.689,107.772
SWD: P2.4 U2.25 | length 10
  Top Layer w0.203: P2.4 122.657,107.328 122.657,101.702 124.025,100.333 U2.25
TXD: R17.2 TP2.1 U2.6 | length 26.7
  Top Layer w0.203: U2.6 135.804,94.879 139.268,91.415 TP2.1 138.962,89.33 138.962,87.276 140.056,86.182 143.637,82.601 R17.2
USB_DM: U2.46
USB_DP: U2.47
VBAT: C10.1 P1.1 Q1.3 R6.2 TP6.1 | length 25.1
  Top Layer w0.254: TP6.1 88.349,85.301 Q1.3 94.488,87.046 94.971,87.528 98.908,87.528 100.635,89.256 P1.1 ; R6.2 97.067,91.11 98.527,91.11 99.187,91.77 P1.1 ; C10.1 103.632,91.948 103.454,91.77 P1.1
VDC: D2.1 D3.1 Q1.1 R3.1 R9.1 U3.4 | length 44.7
  Top Layer w0.254: v1(91.11,84.15) 91.513,84.553 91.967,84.553 91.97,84.557 93.015,84.557 93.538,84.033 Q1.1 91.712,83.101 90.257,81.646 D3.1 90.257,77.002 90.765,76.494 97.703,76.494 98.031,76.822 R9.1 ; v1(95.656,90.907) 93.876,90.907 D2.1 93.774,91.945 95.528,93.699 U3.4 95.569,94.158 96.444,94.158 97.13,94.844 97.13,97.638 97.638,98.146 R3.1
  Bottom Layer w0.254: v1(91.11,84.15) 91.11,85.217 95.656,89.764 v1(95.656,90.907)
VDD: C1.1 C2.1 C4.1 C7.1 C8.1 C9.1 C11.1 C12.1 C13.2 C19.1 C24.2 C25.2 IC1.1 IC2.8 P3.1 Q2.3 R1.1 R5.1 R7.2 R13.1 R21.2 R23.2 TP9.1 U2.1 U2.10 U2.22 U2.33 U2.42 U2.43 U2.44 U2.48 U2.49 U7.2 U7.6 U7.8 | length 177.6
  Top Layer w0.203: Q2.3 116.459,84.777 116.459,89.891 116.804,90.235 C12.1 118.752,91.516 119.228,91.516 119.74,92.029 U2.43 122.825,92.862 122.809,92.879 ; R5.1 118.872,97.384 118.225,96.737 R7.2 119.107,95.809 119.777,96.479 U2.33 122.768,96.479 122.809,96.437 122.809,92.879 ; C4.1 119.276,90.726 119.558,91.008 122.707,91.008 123.225,91.526 U2.44 123.225,92.854 ; C9.1 119.709,92.879 U2.42 122.809,92.879 ; IC2.8@122.003,80.264 122.003,78.682 122.657,78.029 124.929,78.029 R13.1 ; C11.1 122.884,90.088 123.602,90.805 124.384,90.805 124.825,91.246 U2.48 124.825,92.854 ; C1.1 124.689,90.322 125.225,90.859 U2.49 125.225,92.854 125.201,92.879 122.809,92.879 ; U2.22 125.225,101.324 126.198,102.297 C8.1 ; C8.1@127.076,102.297 128.437,102.297 v1(128.448,102.286) ; v1(130.607,97.917) 130.203,97.513 130.203,96.479 ; C24.2 133.209,70.677 133.751,70.135 U7.2 135.286,70.135 ; C7.1 131.319,96.479 130.203,96.479 ; v1(135.56,84.836) 135.088,85.308 C19.1 134.112,86.512 132.283,88.341 132.283,91.237 131.938,91.582 C2.1 131.191,92.227 130.54,92.879 U2.1 128,92.879 127.737,93.142 127.737,96.342 127.873,96.479 U2.10 130.203,96.479 ; C25.2 137.16,66.472 137.668,66.98 137.668,69.113 137.297,69.485 U7.8 135.534,69.485 135.28,69.739 135.28,70.129 135.286,70.135 ; v1(136.423,100.736) 136.513,100.647 R1.1 138.201,99.619 140.118,97.703 C13.2 146.449,97.703 IC1.1 ; R21.2 136.969,77.318 v1(138.481,77.318) ; v1(138.354,70.993) 138.145,70.785 U7.6 135.514,70.785 135.286,70.557 135.286,70.135
  Top Layer w0.254: R13.1 124.955,72.149 131.775,65.329 135.738,65.329 136.057,65.648 C25.2
  Top Layer w0.305: Q2.3 114.503,83.058 115.976,81.585 P3.1 119.355,77.699 TP9.1 119.456,79.223 120.498,80.264 122.003,80.264 IC2.8 ; R23.2 134.403,75.755 135.903,77.255 R21.2
  Bottom Layer w0.203: v1(128.448,102.286) 129.489,101.244 129.489,99.035 v1(130.607,97.917) 131.75,99.06 134.747,99.06 v1(136.423,100.736) ; v1(135.56,84.836) 137.058,84.836 138.481,83.414 v1(138.481,77.318) 138.481,71.12 v1(138.354,70.993)
VIN: D1.1 U1.1 | length 6.9
  Top Layer w0.356: U1.1 95.86,109.474 96.545,108.788 100.157,108.788 D1.1
XIN: *1.1 U2.20 | length 8.8
  Top Layer w0.203: U2.20 126.025,100.447 126.289,100.711 130.988,100.711 131.714,99.985 *1.1
XOUT: R2.1 U2.21 | length 6.7
  Top Layer w0.203: U2.21 125.625,99.066 125.625,100.936 125.984,101.295 128.524,101.295 128.765,101.536 R2.1
pads on no net: IC1.3 IC1.4 IC1.5 IC1.6 IC1.7 IC1.8 IC1.11 IC1.12 IC1.13 IC1.18 IC1.19 IC1.20 IC1.21 IC1.23 IC1.25 IC1.26 IC1.27 IC1.28 P2.6 P2.8 U4.4

## Polygon pours and split planes (outlines as drawn)
GND on Bottom Layer "GND_L02_P001" (solid, pour order 1): 85.725,109.855 173.355,109.855 173.355,62.865 85.725,62.865

## Silkscreen, mask and mechanical layers (free items; w line width, h text height)
Mechanical 8:
  lines w0.254: 85.09,110.49 85.09,62.23 173.736,62.23 173.736,110.49
Mechanical 12:
  lines w0.254: 85.09,110.49 173.736,110.49

## Text inside footprints (layer, text, board x,y; h text height)
P2: Top Overlay "9" at 121.26,111.773 h0.76 r180; Top Overlay "1" at 126.289,109.868 h0.76 r180